# EAGLE board combined (EAGLE 6.4)
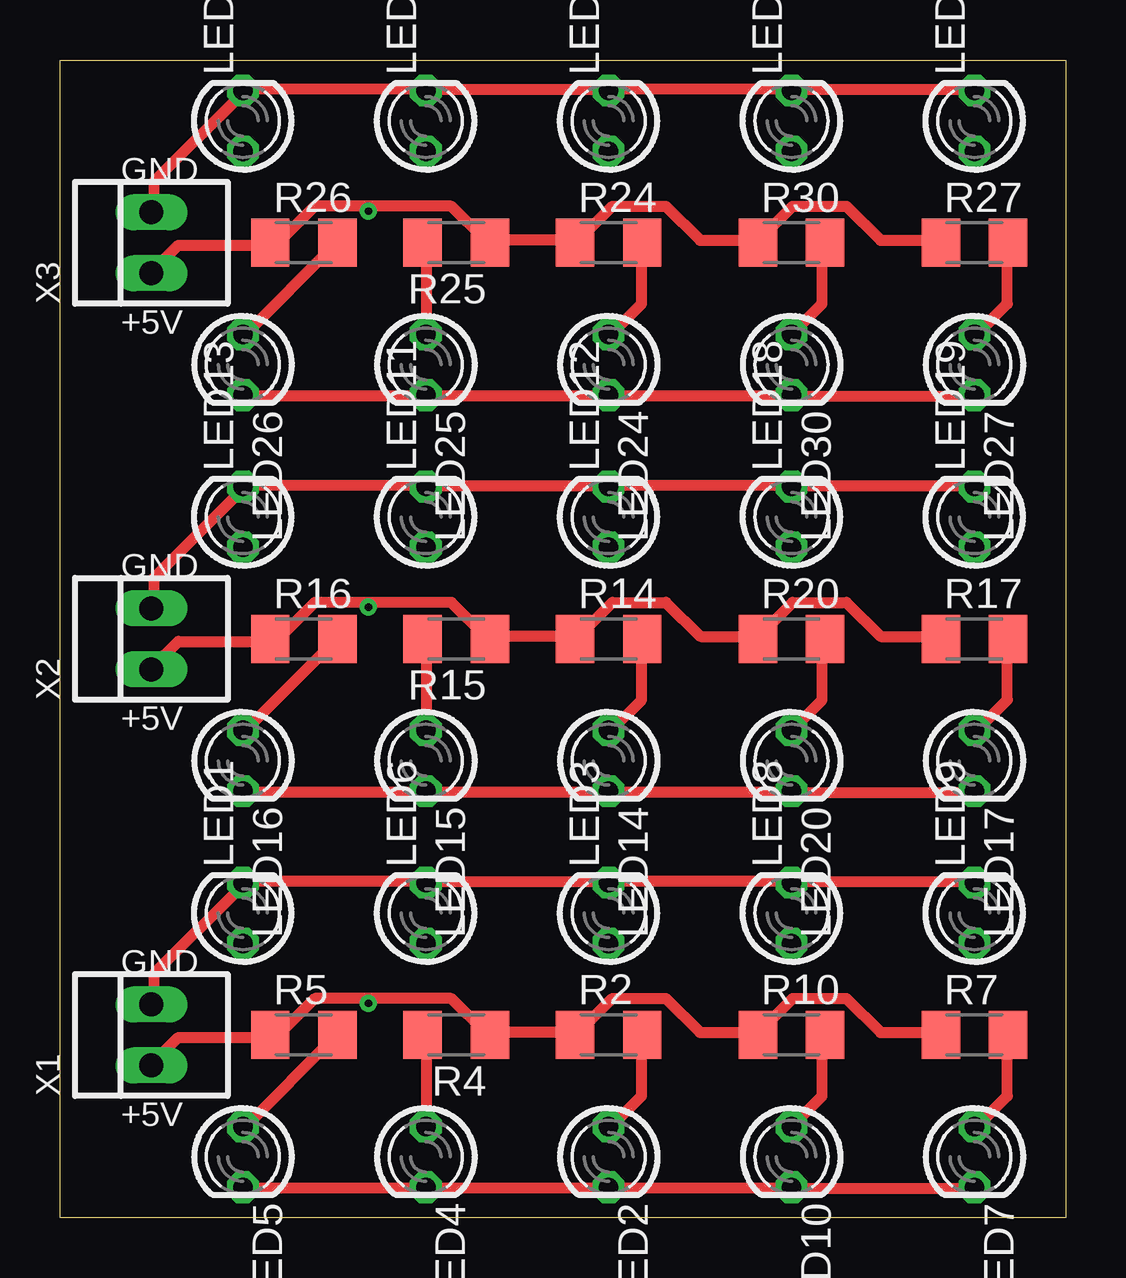
[diagram p0: board, top side]
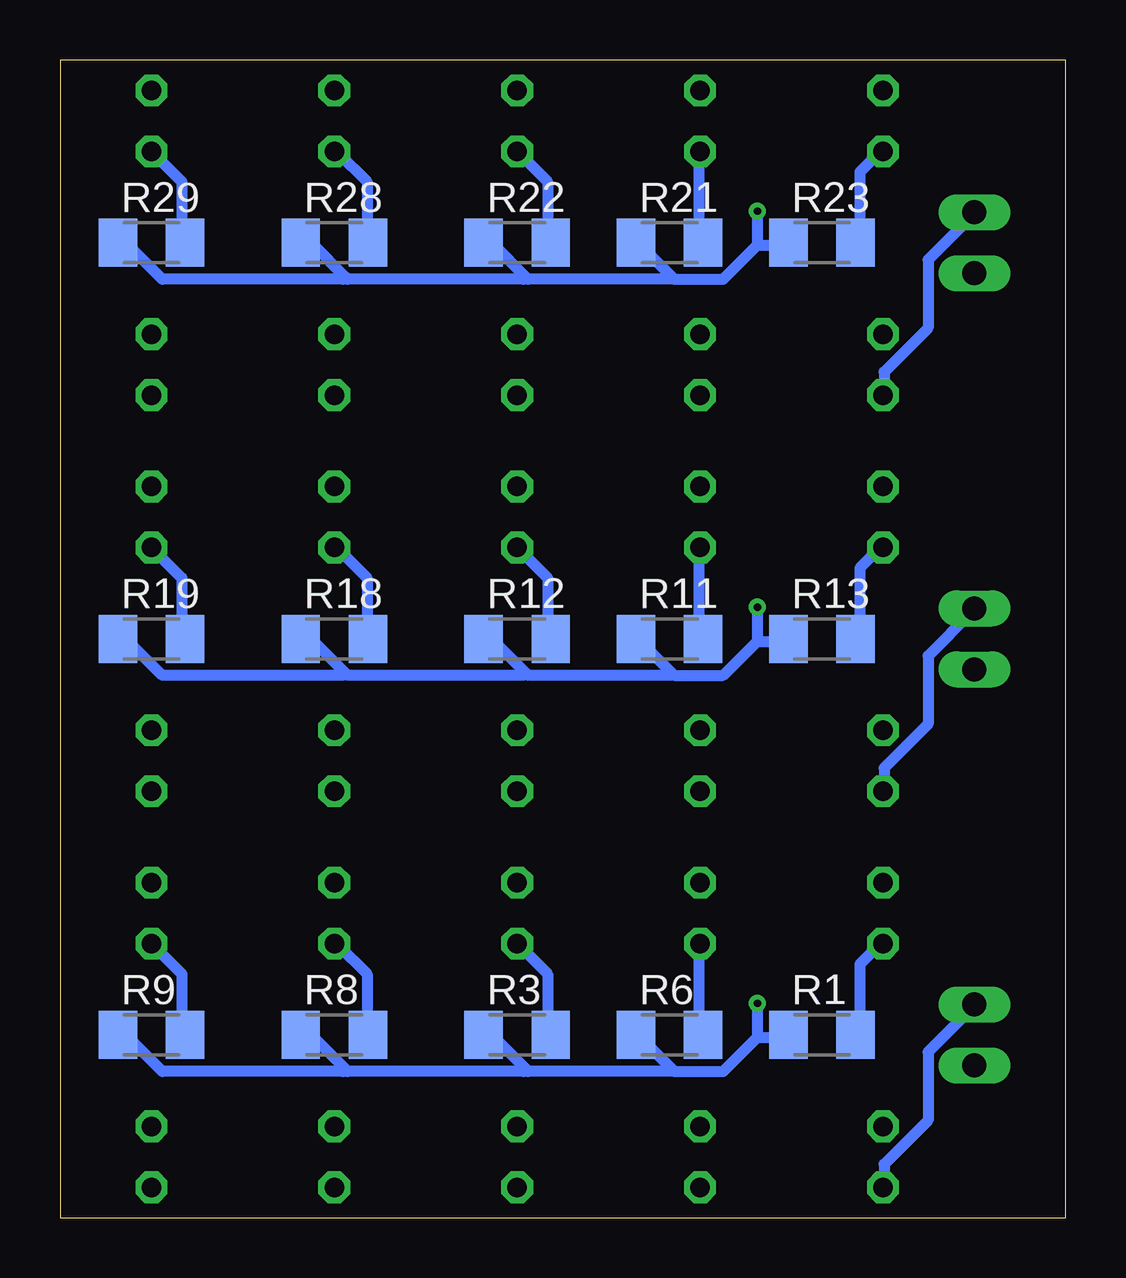
[diagram p1: board, bottom side, seen from below]

Size 41.91 x 48.26 mm. Coordinates in mm from the lower left corner, seen from the top.
Outline: 0,0 0,48.26 41.91,48.26 41.91,0 0,0
Copper layers (1*16): Top 0.035mm / dielectric 1.5mm / Bottom 0.035mm
Design rules "default": minimum track width 10mil, minimum drill 24mil, track to track 8mil, track to pad 8mil, pad to pad 8mil, via to via 8mil, smd to smd 8mil, copper to edge 40mil, drill to drill 8mil, minimum pad ring 10mil, minimum via ring 8mil, stop-mask expansion 4mil, vias tented up to drill 0mil, thermal gap 10mil
Net classes: 0 default: width 0.457 mm; 1 power: width 0.457 mm

## Footprints (pad centres in the part's own frame; a part is rotated, then mirrored left to right if it is on the bottom)
LED3MM = drill 0.813 octagon: A -1.27,0; K 1.27,0
M1206 = smd 1.6 x 2: 1 -1.4,0; 2 1.4,0
22-23-2021 = drill 1 long: 1 -1.27,0; 2 1.27,0

## Placement (x,y rotation side)
LED1  LED3MM  [LED3MM]  7.62,12.7 90 top
LED2  LED3MM  [LED3MM]  22.86,2.54 270 top
LED3  LED3MM  [LED3MM]  22.86,12.7 90 top
LED4  LED3MM  [LED3MM]  15.24,2.54 270 top
LED5  LED3MM  [LED3MM]  7.62,2.54 270 top
LED6  LED3MM  [LED3MM]  15.24,12.7 90 top
LED7  LED3MM  [LED3MM]  38.1,2.54 270 top
LED8  LED3MM  [LED3MM]  30.48,12.7 90 top
LED9  LED3MM  [LED3MM]  38.1,12.7 90 top
LED10  LED3MM  [LED3MM]  30.48,2.54 270 top
LED11  LED3MM  [LED3MM]  15.24,29.21 90 top
LED12  LED3MM  [LED3MM]  22.86,29.21 90 top
LED13  LED3MM  [LED3MM]  7.62,29.21 90 top
LED14  LED3MM  [LED3MM]  22.86,19.05 270 top
LED15  LED3MM  [LED3MM]  15.24,19.05 270 top
LED16  LED3MM  [LED3MM]  7.62,19.05 270 top
LED17  LED3MM  [LED3MM]  38.1,19.05 270 top
LED18  LED3MM  [LED3MM]  30.48,29.21 90 top
LED19  LED3MM  [LED3MM]  38.1,29.21 90 top
LED20  LED3MM  [LED3MM]  30.48,19.05 270 top
LED21  LED3MM  [LED3MM]  15.24,45.72 90 top
LED22  LED3MM  [LED3MM]  22.86,45.72 90 top
LED23  LED3MM  [LED3MM]  7.62,45.72 90 top
LED24  LED3MM  [LED3MM]  22.86,35.56 270 top
LED25  LED3MM  [LED3MM]  15.24,35.56 270 top
LED26  LED3MM  [LED3MM]  7.62,35.56 270 top
LED27  LED3MM  [LED3MM]  38.1,35.56 270 top
LED28  LED3MM  [LED3MM]  30.48,45.72 90 top
LED29  LED3MM  [LED3MM]  38.1,45.72 90 top
LED30  LED3MM  [LED3MM]  30.48,35.56 270 top
R1  1k  [M1206]  10.16,7.62 0 bottom
R2  1k  [M1206]  22.86,7.62 0 top
R3  1k  [M1206]  22.86,7.62 0 bottom
R4  1k  [M1206]  16.51,7.62 180 top
R5  1k  [M1206]  10.16,7.62 0 top
R6  1k  [M1206]  16.51,7.62 0 bottom
R7  1k  [M1206]  38.1,7.62 0 top
R8  1k  [M1206]  30.48,7.62 0 bottom
R9  1k  [M1206]  38.1,7.62 0 bottom
R10  1k  [M1206]  30.48,7.62 0 top
R11  1k  [M1206]  16.51,24.13 0 bottom
R12  1k  [M1206]  22.86,24.13 0 bottom
R13  1k  [M1206]  10.16,24.13 0 bottom
R14  1k  [M1206]  22.86,24.13 0 top
R15  1k  [M1206]  16.51,24.13 180 top
R16  1k  [M1206]  10.16,24.13 0 top
R17  1k  [M1206]  38.1,24.13 0 top
R18  1k  [M1206]  30.48,24.13 0 bottom
R19  1k  [M1206]  38.1,24.13 0 bottom
R20  1k  [M1206]  30.48,24.13 0 top
R21  1k  [M1206]  16.51,40.64 0 bottom
R22  1k  [M1206]  22.86,40.64 0 bottom
R23  1k  [M1206]  10.16,40.64 0 bottom
R24  1k  [M1206]  22.86,40.64 0 top
R25  1k  [M1206]  16.51,40.64 180 top
R26  1k  [M1206]  10.16,40.64 0 top
R27  1k  [M1206]  38.1,40.64 0 top
R28  1k  [M1206]  30.48,40.64 0 bottom
R29  1k  [M1206]  38.1,40.64 0 bottom
R30  1k  [M1206]  30.48,40.64 0 top
X1  22-23-2021  [22-23-2021]  3.81,7.62 90 top
X2  22-23-2021  [22-23-2021]  3.81,24.13 90 top
X3  22-23-2021  [22-23-2021]  3.81,40.64 90 top

## Library data of the parts
LED1-LED30 = lpatiny
R1-R30 = resistor
X1-X3 = con-molex; MF: MOLEX; MPN: 22-23-2021; OC_FARNELL: 1462926; OC_NEWARK: 25C3832

## Nets
+5V: R1.1 R2.1 R3.1 R4.1 R5.1 R6.1 R7.1 R8.1 R9.1 R10.1 X1.1
+5V1: R11.1 R12.1 R13.1 R14.1 R15.1 R16.1 R17.1 R18.1 R19.1 R20.1 X2.1
+5V2: R21.1 R22.1 R23.1 R24.1 R25.1 R26.1 R27.1 R28.1 R29.1 R30.1 X3.1
GND [power]: LED1.K LED2.K LED3.K LED4.K LED5.K LED6.K LED7.K LED8.K LED9.K LED10.K X1.2
GND1 [power]: LED11.K LED12.K LED13.K LED14.K LED15.K LED16.K LED17.K LED18.K LED19.K LED20.K X2.2
GND2 [power]: LED21.K LED22.K LED23.K LED24.K LED25.K LED26.K LED27.K LED28.K LED29.K LED30.K X3.2
N$1: LED1.A R1.2
N$2: LED2.A R2.2
N$3: LED4.A R4.2
N$4: LED5.A R5.2
N$5: LED7.A R7.2
N$6: LED8.A R8.2
N$7: LED9.A R9.2
N$8: LED10.A R10.2
N$9: LED11.A R11.2
N$10: LED12.A R12.2
N$11: LED13.A R13.2
N$12: LED14.A R14.2
N$13: LED15.A R15.2
N$14: LED16.A R16.2
N$15: LED17.A R17.2
N$16: LED3.A R3.2
N$17: LED18.A R18.2
N$18: LED19.A R19.2
N$19: LED20.A R20.2
N$20: LED21.A R21.2
N$21: LED22.A R22.2
N$22: LED23.A R23.2
N$23: LED6.A R6.2
N$24: LED24.A R24.2
N$25: LED25.A R25.2
N$26: LED26.A R26.2
N$27: LED27.A R27.2
N$28: LED28.A R28.2
N$29: LED29.A R29.2
N$30: LED30.A R30.2

## Tracks (layer width: path | path; a pad name or v marks a point on that pad's centre or on a via)
+5V  (via drill 0.3)
  Top 0.457: X1.1 3.91,6.5 4.93,7.52 8.59,7.52 R5.1 8.79,7.72 9.2,7.72 10.62,9.14 12.85,9.14 | R7.1 36.63,7.72 34.19,7.72 32.77,9.14 30.53,9.14 29.11,7.72 R10.1 28.91,7.72 26.67,7.72 25.25,9.14 23.01,9.14 21.59,7.72 R2.1 21.39,7.72 17.93,7.72 R4.1 17.73,7.72 16.31,9.14 12.85,9.14 | v12.85,8.94 12.85,9.14
  Bottom 0.457: 12.85,7.52 11.63,7.52 R1.1 | 12.85,7.52 14.28,6.1 16.31,6.1 | 16.31,6.1 17.73,7.52 R4.1 | 22.5,6.2 22.4,6.1 16.31,6.1 | 22.5,6.2 23.82,7.52 24.23,7.52 R3.1 | 30.02,6.2 29.92,6.1 22.61,6.1 22.5,6.2 | 30.02,6.2 31.34,7.52 31.75,7.52 R8.1 | R9.1 39.47,7.52 39.06,7.52 37.64,6.1 30.12,6.1 30.02,6.2 | v12.85,8.94 12.85,7.52
+5V1  (via drill 0.3)
  Top 0.457: X2.1 3.91,23.01 4.93,24.03 8.59,24.03 R16.1 8.79,24.23 9.2,24.23 10.62,25.65 12.85,25.65 | R17.1 36.63,24.23 34.19,24.23 32.77,25.65 30.53,25.65 29.11,24.23 R20.1 28.91,24.23 26.67,24.23 25.25,25.65 23.01,25.65 21.59,24.23 R14.1 21.39,24.23 17.93,24.23 R15.1 17.73,24.23 16.31,25.65 12.85,25.65 | v12.85,25.45 12.85,25.65
  Bottom 0.457: 12.85,24.03 11.63,24.03 R13.1 | 12.85,24.03 14.28,22.61 16.31,22.61 | 16.31,22.61 17.73,24.03 R15.1 | 22.5,22.71 22.4,22.61 16.31,22.61 | 22.5,22.71 23.82,24.03 24.23,24.03 R12.1 | 30.02,22.71 29.92,22.61 22.61,22.61 22.5,22.71 | 30.02,22.71 31.34,24.03 31.75,24.03 R18.1 | R19.1 39.47,24.03 39.06,24.03 37.64,22.61 30.12,22.61 30.02,22.71 | v12.85,25.45 12.85,24.03
+5V2  (via drill 0.3)
  Top 0.457: X3.1 3.91,39.52 4.93,40.54 8.59,40.54 R26.1 8.79,40.74 9.2,40.74 10.62,42.16 12.85,42.16 | R27.1 36.63,40.74 34.19,40.74 32.77,42.16 30.53,42.16 29.11,40.74 R30.1 28.91,40.74 26.67,40.74 25.25,42.16 23.01,42.16 21.59,40.74 R24.1 21.39,40.74 17.93,40.74 R25.1 17.73,40.74 16.31,42.16 12.85,42.16 | v12.85,41.96 12.85,42.16
  Bottom 0.457: 12.85,40.54 11.63,40.54 R23.1 | 12.85,40.54 14.28,39.12 16.31,39.12 | 16.31,39.12 17.73,40.54 R25.1 | 22.5,39.22 22.4,39.12 16.31,39.12 | 22.5,39.22 23.82,40.54 24.23,40.54 R22.1 | 30.02,39.22 29.92,39.12 22.61,39.12 22.5,39.22 | 30.02,39.22 31.34,40.54 31.75,40.54 R28.1 | R29.1 39.47,40.54 39.06,40.54 37.64,39.12 30.12,39.12 30.02,39.22 | v12.85,41.96 12.85,40.54
GND
  Top 0.457: LED5.K 7.77,1.22 15.09,1.22 LED4.K 15.29,1.22 22.81,1.22 LED2.K 23.01,1.22 30.33,1.22 LED10.K 30.53,1.22 38.05,1.22 LED7.K | LED9.K 38.05,14.02 30.53,14.02 LED8.K 30.33,14.02 23.01,14.02 LED3.K 22.81,14.02 15.29,14.02 LED6.K 15.09,14.02 7.77,14.02 LED1.K 7.57,13.82 3.91,10.16 3.91,8.94 X1.2
  Bottom 0.457: LED5.K 7.57,1.42 7.57,2.23 5.74,4.06 5.74,6.91 3.91,8.74 X1.2
GND1
  Top 0.457: LED16.K 7.77,17.73 15.09,17.73 LED15.K 15.29,17.73 22.81,17.73 LED14.K 23.01,17.73 30.33,17.73 LED20.K 30.53,17.73 38.05,17.73 LED17.K | LED19.K 38.05,30.53 30.53,30.53 LED18.K 30.33,30.53 23.01,30.53 LED12.K 22.81,30.53 15.29,30.53 LED11.K 15.09,30.53 7.77,30.53 LED13.K 7.57,30.33 3.91,26.67 3.91,25.45 X2.2
  Bottom 0.457: LED16.K 7.57,17.93 7.57,18.75 5.74,20.57 5.74,23.42 3.91,25.25 X2.2
GND2
  Top 0.457: LED26.K 7.77,34.24 15.09,34.24 LED25.K 15.29,34.24 22.81,34.24 LED24.K 23.01,34.24 30.33,34.24 LED30.K 30.53,34.24 38.05,34.24 LED27.K | LED29.K 38.05,47.04 30.53,47.04 LED28.K 30.33,47.04 23.01,47.04 LED22.K 22.81,47.04 15.29,47.04 LED21.K 15.09,47.04 7.77,47.04 LED23.K 7.57,46.84 3.91,43.18 3.91,41.96 X3.2
  Bottom 0.457: LED26.K 7.57,34.44 7.57,35.26 5.74,37.08 5.74,39.93 3.91,41.76 X3.2
N$1
  Bottom 0.457: R1.2 8.59,7.72 8.59,10.57 7.77,11.38 LED1.A
N$2
  Top 0.457: R2.2 24.23,7.52 24.23,5.08 23.01,3.86 LED2.A
N$3
  Top 0.457: R4.2 15.29,7.52 15.29,3.86 LED4.A
N$4
  Top 0.457: R5.2 11.43,7.52 7.77,3.86 LED5.A
N$5
  Top 0.457: R7.2 39.47,7.52 39.47,5.08 38.25,3.86 LED7.A
N$6
  Bottom 0.457: R8.2 29.11,7.72 29.11,10.16 30.33,11.38 LED8.A
N$7
  Bottom 0.457: LED9.A 36.83,10.16 36.83,7.72 R9.2
N$8
  Top 0.457: LED10.A 31.75,5.08 31.75,7.52 R10.2
N$9
  Bottom 0.457: R11.2 15.29,24.23 15.29,27.89 LED11.A
N$10
  Bottom 0.457: LED12.A 21.59,26.67 21.59,24.23 R12.2
N$11
  Bottom 0.457: R13.2 8.59,24.23 8.59,27.08 7.77,27.89 LED13.A
N$12
  Top 0.457: R14.2 24.23,24.03 24.23,21.59 23.01,20.37 LED14.A
N$13
  Top 0.457: R15.2 15.29,24.03 15.29,20.37 LED15.A
N$14
  Top 0.457: R16.2 11.43,24.03 7.77,20.37 LED16.A
N$15
  Top 0.457: R17.2 39.47,24.03 39.47,21.59 38.25,20.37 LED17.A
N$16
  Bottom 0.457: LED3.A 21.59,10.16 21.59,7.72 R3.2
N$17
  Bottom 0.457: R18.2 29.11,24.23 29.11,26.67 30.33,27.89 LED18.A
N$18
  Bottom 0.457: LED19.A 36.83,26.67 36.83,24.23 R19.2
N$19
  Top 0.457: LED20.A 31.75,21.59 31.75,24.03 R20.2
N$20
  Bottom 0.457: R21.2 15.29,40.74 15.29,44.4 LED21.A
N$21
  Bottom 0.457: LED22.A 21.59,43.18 21.59,40.74 R22.2
N$22
  Bottom 0.457: R23.2 8.59,40.74 8.59,43.59 7.77,44.4 LED23.A
N$23
  Bottom 0.457: R6.2 15.29,7.72 15.29,11.38 LED6.A
N$24
  Top 0.457: R24.2 24.23,40.54 24.23,38.1 23.01,36.88 LED24.A
N$25
  Top 0.457: R25.2 15.29,40.54 15.29,36.88 LED25.A
N$26
  Top 0.457: R26.2 11.43,40.54 7.77,36.88 LED26.A
N$27
  Top 0.457: R27.2 39.47,40.54 39.47,38.1 38.25,36.88 LED27.A
N$28
  Bottom 0.457: R28.2 29.11,40.74 29.11,43.18 30.33,44.4 LED28.A
N$29
  Bottom 0.457: LED29.A 36.83,43.18 36.83,40.74 R29.2
N$30
  Top 0.457: LED30.A 31.75,38.1 31.75,40.54 R30.2

## Text on the board
tNames: GND | +5V | GND | +5V | GND | +5V